# EAGLE board cryocooler_phase_lock (EAGLE 6.5.0)
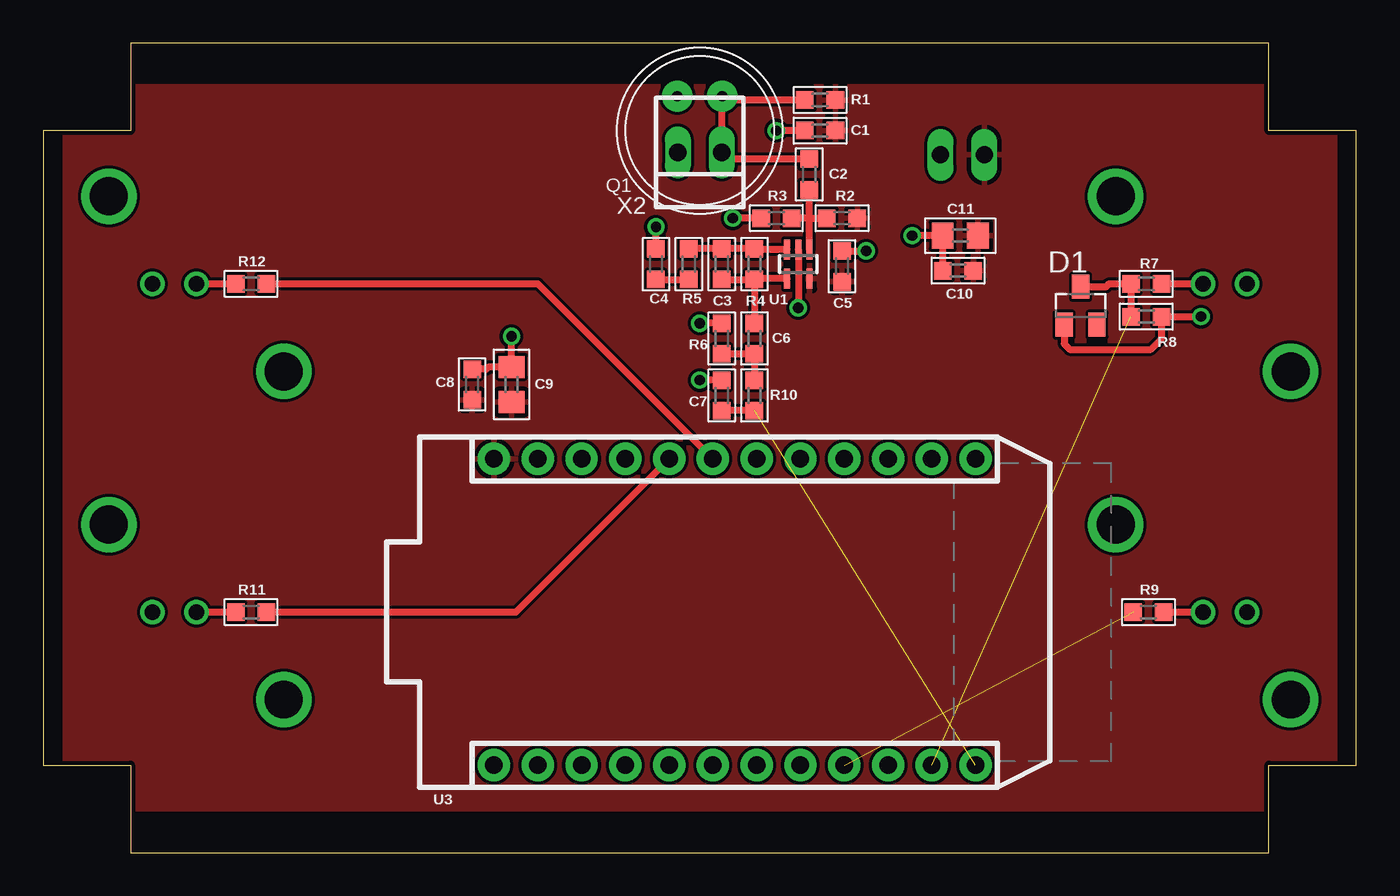
[diagram p0: board, top side]
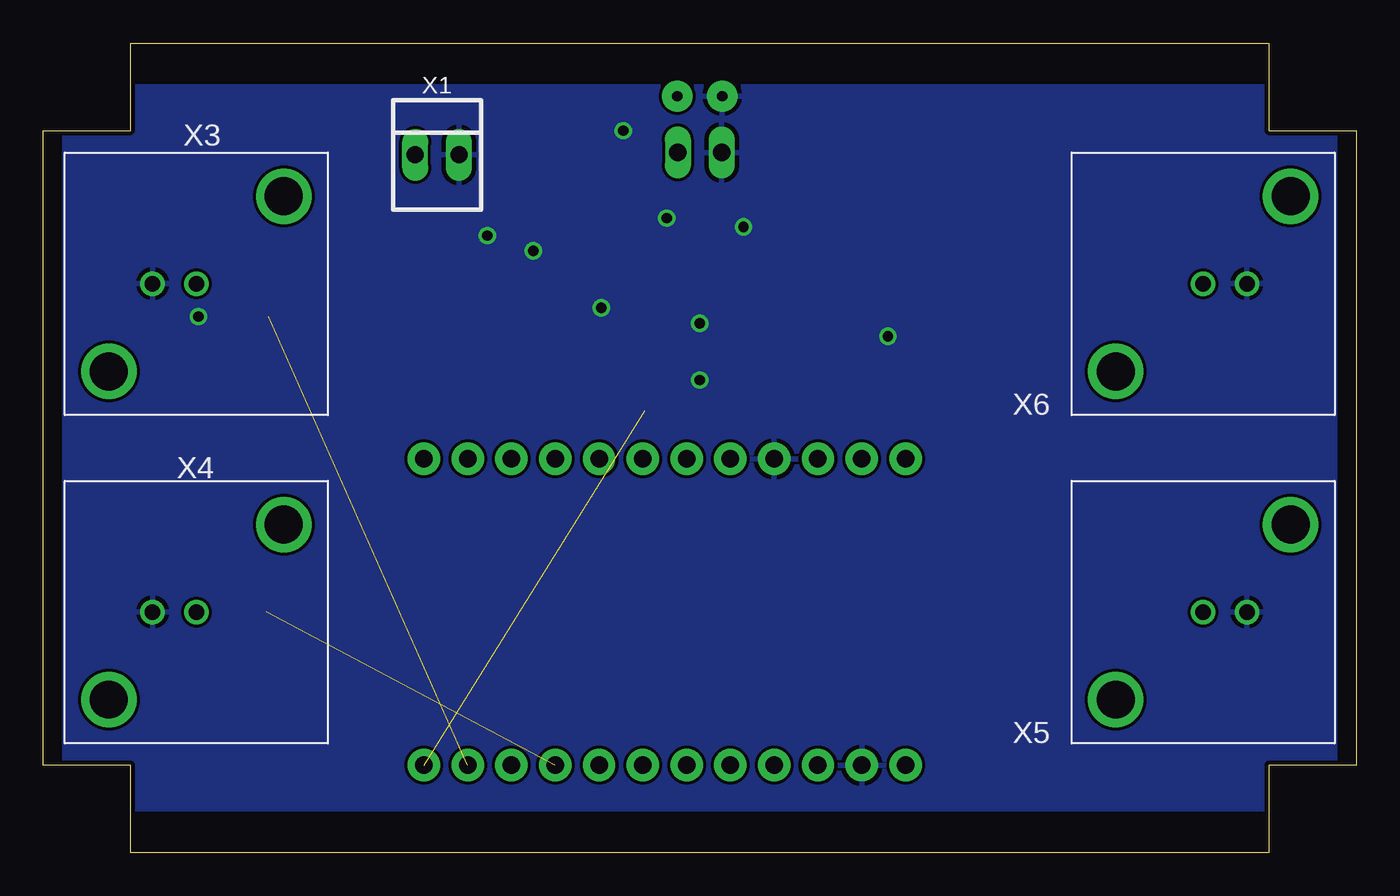
[diagram p1: board, bottom side, seen from below]

Size 76.2 x 46.99 mm. Coordinates in mm from the lower left corner, seen from the top.
Outline: 0,5.08 5.08,5.08 5.08,0 71.12,0 71.12,5.08 76.2,5.08 76.2,41.91 71.12,41.91 71.12,46.99 5.08,46.99 5.08,41.91 0,41.91 0,5.08
Copper layers (1*16): Top 0.035mm / dielectric 1.5mm / Bottom 0.035mm
Design rules "default *": minimum track width 10mil, minimum drill 10mil, track to track 7mil, track to pad 7mil, pad to pad 7mil, via to via 7mil, smd to smd 7mil, copper to edge 10mil, drill to drill 8mil, minimum pad ring 10mil, minimum via ring 8mil, stop-mask expansion 4mil, vias tented up to drill 0mil, thermal gap 10mil
Net classes: 1 standard: width 0.61 mm, clearance 0.254 mm
tRestrict: area 79.4,22.5 to 88.5,39.9
bRestrict: area 95.3,15.3 to 104.4,32.7

## Footprints (pad centres in the part's own frame; a part is rotated, then mirrored left to right if it is on the bottom)
0603 = smd 1.016 x 1.016: 1 -0.889,0; 2 0.889,0
0805 = smd 1.27 x 1.524: 1 -1.016,0; 2 1.016,0
SOT23 = smd 1 x 1.4: 1 -0.95,-1.1; 2 0.95,-1.1; 3 0,1.1
ELECTRET_9.7 = drill 0.6 pad 1.778: + 1.3,2; - -1.3,2
SC70-5 = smd 0.35 x 1.15: 1 -0.65,-0.85; 2 0,-0.85; 3 0.65,-0.85; 4 0.65,0.85; 5 -0.65,0.85
PHOTON = drill 1.016 pad 1.88: 1 1.27,32.258; 2 1.27,29.718; 3 1.27,27.178; 4 1.27,24.638; 5 1.27,22.098; 6 1.27,19.558; 7 1.27,17.018; 8 1.27,14.478; 9 1.27,11.938; 10 1.27,9.398; 11 1.27,6.858; 12 1.27,4.318; 13 19.05,4.318; 14 19.05,6.858; 15 19.05,9.398; 16 19.05,11.938; 17 19.05,14.478; 18 19.05,17.018; 19 19.05,19.558; 20 19.05,22.098; 21 19.05,24.638; 22 19.05,27.178; 23 19.05,29.718; 24 19.05,32.258
22-23-2021 = drill 1 long: 1 -1.27,0; 2 1.27,0
BNC_VERTICAL = drill 0.9: GND 5.08,7.62; SIGNAL 7.62,7.62 | drill 2.2: MOUNT1 12.7,12.7; MOUNT2 2.54,2.54

## Placement (x,y rotation side)
C1  0.1u  [0603]  45.09,41.91 180 top
C2  0.1u  [0603]  44.45,39.37 270 top
C3  47pF  [0603]  39.37,34.16 270 top
C4  10u  [0603]  35.56,34.16 90 top
C5  0.1u  [0603]  46.35,34.04 90 top
C6  15n  [0603]  41.27,29.84 270 top
C7  560p  [0603]  39.37,26.54 90 top
C8  0.1u  [0603]  24.89,27.18 90 top
C9  4.7u  [0805]  27.18,27.18 270 top
C10  0.1u  [0603]  53.09,33.78 180 top
C11  4.7u  [0805]  53.21,35.81 0 top
D1  BAT54  [SOT23]  60.2,31.75 0 top
Q1  CMA-4544PF-W  [ELECTRET_9.7]  38.1,41.91 0 top
R1  1k  [0603]  45.09,43.69 0 top
R2  1M  [0603]  46.35,36.83 0 top
R3  1M  [0603]  42.55,36.83 0 top
R4  150k  [0603]  41.27,34.16 90 top
R5  1k  [0603]  37.47,34.16 270 top
R6  10k  [0603]  39.37,29.84 270 top
R7  1.5k  [0603]  64.01,33.02 0 top
R8  3k  [0603]  64.01,31.11 180 top
R9  1.5k  [0603]  64.14,13.97 0 top
R10  1k  [0603]  41.27,26.54 90 top
R11  1.5k  [0603]  12.06,13.97 0 top
R12  1.5k  [0603]  12.06,33.02 0 top
U1  MAX4466EXK+T  [SC70-5]  43.81,34.16 180 top
U3  PHOTON_WITH_HEADERS  [PHOTON]  58.42,3.81 90 top
X1  22-23-2021  [22-23-2021]  53.34,40.51 0 bottom
X2  22-23-2021  [22-23-2021]  38.1,40.64 180 top
X3  BNC_VERTICAL  [BNC_VERTICAL]  74.93,25.4 0 bottom
X4  BNC_VERTICAL  [BNC_VERTICAL]  74.93,6.35 0 bottom
X5  BNC_VERTICAL  [BNC_VERTICAL]  1.27,21.59 180 bottom
X6  BNC_VERTICAL  [BNC_VERTICAL]  1.27,40.64 180 bottom

## Library data of the parts
C1-C11 R1-R12 = acrooptics
D1 = diode
Q1 U1 = microbuilder
U3 = Spark
X1 X2 = con-molex; MF: MOLEX; MPN: 22-23-2021; OC_FARNELL: 1462926; OC_NEWARK: 25C3832
X3-X6 = noah

## Nets
3.3V: C1.1 C5.1 C8.1 C9.2 C10.1 C11.2 R1.2 R2.2 U1.5 U3.24 X1.1
AUDIO_IN: C3.2 C6.1 R4.1 U1.4
DELAY_ADJUST: R7.2 X3.SIGNAL
GND: C1.2 C4.2 C5.2 C7.2 C8.2 C9.1 C10.2 C11.1 D1.1 Q1.- R3.1 R6.1 R8.1 U1.2 U3.2 U3.21 X1.2 X2.2 X3.GND X4.GND X5.GND X6.GND
N10: D1.3 R7.1 R8.2 U3.11
N$1: C2.1 Q1.+ R1.1 X2.1
N$2: C2.2 R2.1 R3.2 U1.1
N$3: C3.1 R4.2 R5.1 U1.3
N$4: C4.1 R5.2
N$5: C6.2 R6.2 R10.2
N$6: C7.1 R10.1 U3.12
N$9: R9.1 U3.9
N$10: R11.2 U3.20
N$12: R12.2 U3.19
SYNC_OUT: R11.1 X5.SIGNAL
TRIGGER_OUT: R12.1 X6.SIGNAL
VBAT: U3.22
VIN: U3.1
VOLUME_INDICATOR: R9.2 X4.SIGNAL

## Tracks (layer width: path | path; a pad name or v marks a point on that pad's centre or on a via)
3.3V
  pour Top: 1.27,2.54 1.27,44.45 74.93,44.45 74.93,2.54
AUDIO_IN
  Top 0.406: U1.4 41.36,33.31 R4.1 | C3.2 R4.1 | R4.1 C6.1
DELAY_ADJUST
  Top 0.406: R7.2 X3.SIGNAL
GND  (via drill 0.6)
  Top 0.406: C8.2 25.73,28.07 25.86,28.19 C9.1 v27.18,29.97 | U1.2 v43.81,31.62 | C5.2 v47.75,34.93 | R6.1 v38.1,30.73 | C7.2 v38.1,27.43 | R3.1 v40.01,36.83 | C1.2 v42.55,41.91 | v67.18,31.11 R8.1 64.9,29.84 64.26,29.21 59.56,29.21 59.25,29.52 D1.1 | C4.2 v35.56,36.32 | C10.2 C11.1 v50.42,35.81
  pour Bottom: 1.27,2.54 1.27,44.45 74.93,44.45 74.93,2.54
N10  (1 unrouted)
  Top 0.406: R8.2 R7.1 61.85,33.02 61.68,32.85 D1.3
N$1
  Top 0.406: R1.1 39.62,43.69 Q1.+ 39.37,43.91 X2.1 39.75,40.26 C2.1
N$2
  Top 0.406: C2.2 44.45,36.83 | 44.45,36.83 R3.2 | 44.45,36.83 44.58,36.83 | 44.58,36.83 R2.1 | U1.1 44.47,36.72 44.58,36.83
N$3
  Top 0.406: U1.3 41.44,35.01 R4.2 C3.1 R5.1
N$4
  Top 0.406: C4.1 R5.2
N$5
  Top 0.406: R6.2 C6.2 R10.2
N$6  (1 unrouted)
  Top 0.406: R10.1 C7.1
N$9  (1 unrouted)
N$10
  Top 0.406: R11.2 27.43,13.97 U3.20
N$12
  Top 0.406: R12.2 28.7,33.02 U3.19
SYNC_OUT
  Top 0.406: X5.SIGNAL R11.1
TRIGGER_OUT
  Top 0.406: X6.SIGNAL R12.1
VOLUME_INDICATOR
  Top 0.406: R9.2 X4.SIGNAL